# Altium PCB JUNORPCDC.PcbDoc (part 3 of 4)
Units mil, origin at the board's own origin, x right, y up, seen from the top; angles counter-clockwise.
Board outline 12224.75 x 6712.94 mil, 12 copper layers (Top Layer, Internal Plane 1, Signal Layer 1, Internal Plane 2, Internal Plane 3, Signal Layer 2, Internal Plane 4, Signal Layer 3, Internal Plane 5, Signal Layer 4, Internal Plane 6, Bottom Layer), stack 101.97 mil thick; 156 components, 400 nets, 1963 pads, 846 vias.
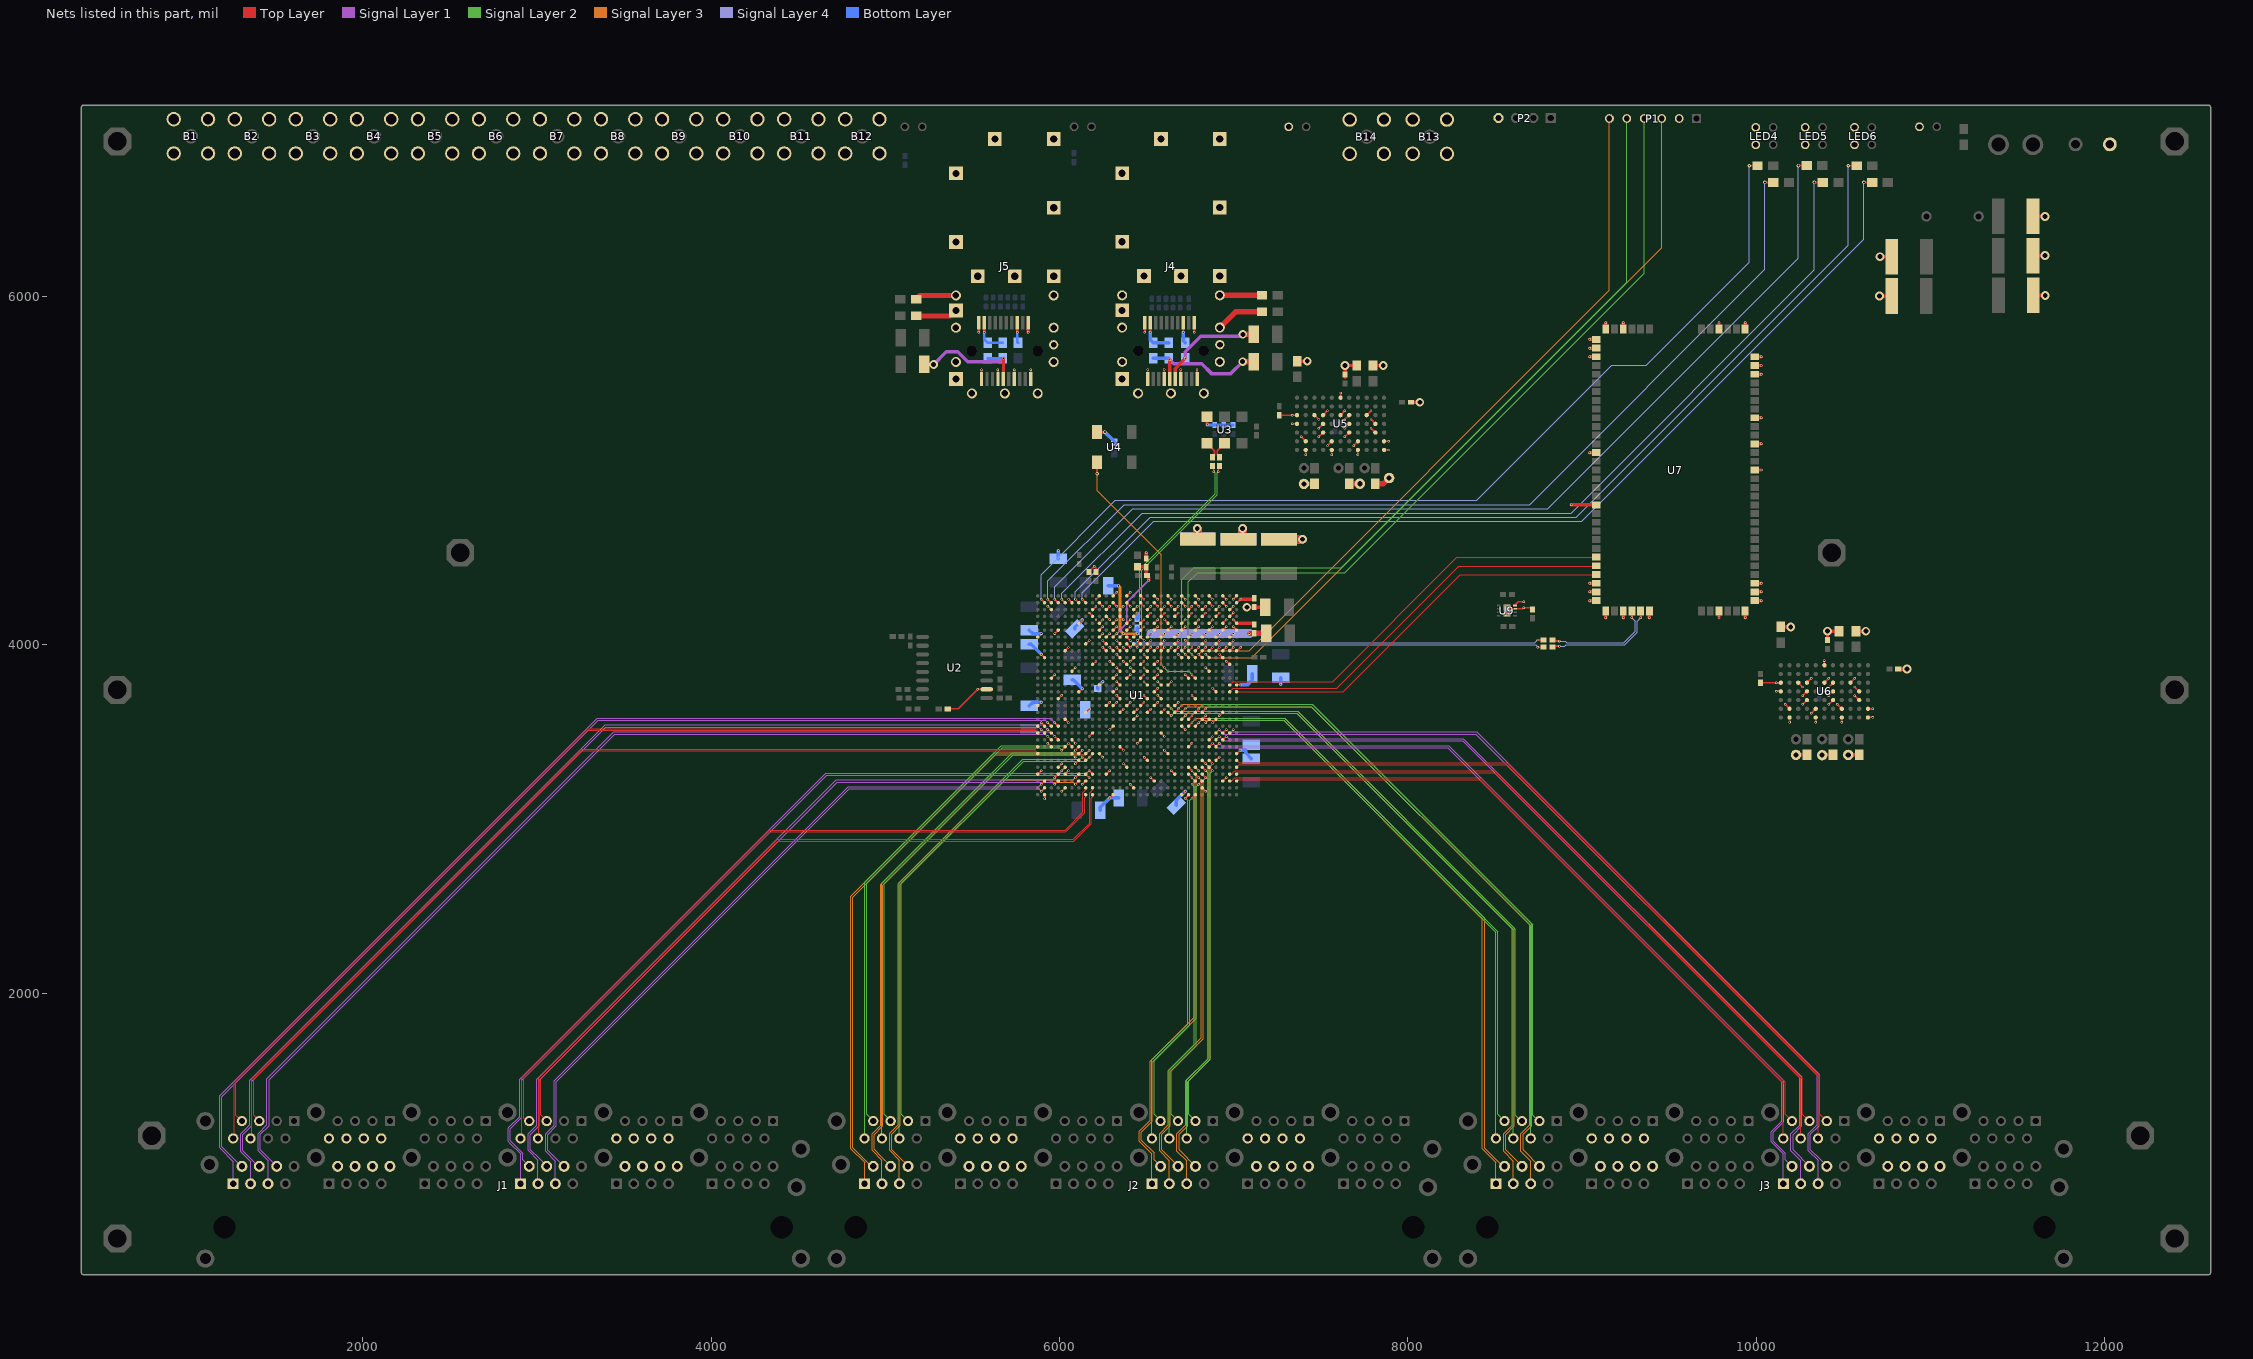
[diagram p13: the nets of this part, all layers, seen from the top]

## Via types
v1: diameter 14, hole 8, Top Layer to Bottom Layer, 811 vias
v2: diameter 50, hole 28, Top Layer to Bottom Layer, 26 vias
v3: diameter 20, hole 10, Top Layer to Bottom Layer, 9 vias

## Nets (pads, with @x,y where several pads share a name; then routed paths per layer and width w, separated by ;. In a path a pad name is that pad's centre, name@x,y a point inside that pad or via, vN(x,y) a via of type N, cw(c..) or ccw(c..) an arc to the next point about the centre after c; other vN are vias at no path point) (continued)
FTDI3_LVDS25_N: J1.G5 U1.AG22 | length 6033.1
  Top Layer w8: v1(5972,3473) U1.AG22@5991.29,3453.71
  Top Layer w10: U1.AG22@5991.29,3453.71 U1.AG22@5992.31,3453.71
  Signal Layer 1 w4: J1.G5@1455,905 1455,1038.03 1399,1094.03 1399,1193 1449,1243 1449,1506.97 3441.03,3499 5946,3499 v1(5972,3473)
FTDI3_LVDS25_P: J1.G6 U1.AH22 | length 5884.6
  Top Layer w10: v1(5933,3473) 5933.65,3473 U1.AH22@5952.94,3453.71
  Signal Layer 1 w4: J1.G6@1505,1005 1411,1099 1411,1188.03 1461,1238.03 1461,1502 3446,3487 5919,3487 v1(5933,3473)
FTDI4_LVDS25_N: J1.J5 U1.AJ28 | length 4162.5
  Top Layer w8: v1@5894.08,3198 U1.AJ28@5913.57,3217.49
  Top Layer w10: v1(5894,3198) v1@5894.08,3198
  Signal Layer 1 w4: J1.J5@3105,905 3105,1035.03 3049,1091.03 3049,1192 3099,1242 3099,1495.97 4787.03,3184 5880,3184 v1(5894,3198)
FTDI4_LVDS25_P: J1.J6 U1.AJ29 | length 4060.7
  Top Layer w8: v1@5894,3158.55 U1.AJ29@5913.57,3178.12
  Top Layer w10: v1(5894,3158) v1@5894,3158.55
  Signal Layer 1 w4: J1.J6@3155,1005 3152,1005 3061,1096 3061,1187.03 3111,1237.03 3111,1491 4792,3172 5880,3172 v1(5894,3158)
FTDI5_LVDS25_N: J2.A4 U1.AC25 | length 2845.5
  Top Layer w8: v1@6130.39,3355 U1.AC25@6149.79,3335.6
  Top Layer w10: v1(6130,3355) v1@6130.39,3355
  Signal Layer 2 w4: J2.A4@5080,1165 5080,2633.97 5788.03,3342 6117,3342 v1(6130,3355)
FTDI5_LVDS25_P: J2.A3 U1.AB24 | length 2785.9
  Top Layer w8: v1@6169.19,3355 U1.AB24@6189.16,3374.97
  Top Layer w10: v1(6169,3355) v1@6169.19,3355
  Signal Layer 2 w4: J2.A3@5130,1265 5092,1303 5092,2629 5793,3330 6144,3330 v1(6169,3355)
FTDI6_LVDS25_N: J2.D4 U1.F26 | length 2195.8
  Top Layer w8: U1.F26@6819.08,3295.92 v1(6839,3276)
  Top Layer w10: U1.F26@6819.08,3295.92 U1.F26@6819.08,3296.23
  Signal Layer 2 w4: J2.D4@6730,1165 6730,1501 6852.5,1623.5 6852.5,3262.5 v1(6839,3276)
FTDI6_LVDS25_P: J2.D3 U1.E26 | length 2111.4
  Top Layer w8: U1.E26@6858.45,3295.55 v1(6878,3276)
  Top Layer w10: U1.E26@6858.45,3295.55 U1.E26@6858.45,3296.23
  Signal Layer 2 w4: J2.D3@6780,1265 6742,1303 6742,1496.03 6864.5,1618.53 6864.5,3262.5 v1(6878,3276)
FTDI7_LVDS25_N: J2.G5 U1.AD27 | length 3064
  Top Layer w8: v1(6091,3237) U1.AD27@6110.42,3256.42
  Top Layer w10: U1.AD27@6110.42,3256.42 U1.AD27@6110.42,3256.86
  Signal Layer 3 w4: J2.G5@5080,905 5080,1040.03 5024,1096.03 5024,1195 5074,1245 5074,2627.97 5668.03,3222 5669.53,3223.5 6077.5,3223.5 v1(6091,3237)
FTDI7_LVDS25_P: J2.G6 U1.AD28 | length 2961.5
  Top Layer w8: v1@6091,3198.07 U1.AD28@6110.42,3217.49
  Top Layer w10: v1(6091,3198) v1@6091,3198.07
  Signal Layer 1 w4: J2.G6@5130,1005 J2.G6@5130,1007
  Signal Layer 3 w4: J2.G6@5130,1005 5130,1007 5075,1062 5036,1101 5036,1190.03 5086,1240.03 5086,2623 5674.5,3211.5 6077.5,3211.5 v1(6091,3198)
FTDI8_LVDS25_N: J2.J5 U1.F25 | length 2541.8
  Top Layer w8: U1.F25@6819.4,3335.6 v1(6839,3316)
  Top Layer w10: U1.F25@6819.08,3335.6 U1.F25@6819.4,3335.6
  Signal Layer 3 w4: J2.J5@6730,905 6730,1036 6674,1092 6674,1193 6724,1243 6724,1495 6852.5,1623.5 6852.5,3302.5 v1(6839,3316)
FTDI8_LVDS25_P: J2.J6 U1.E25 | length 2457.2
  Top Layer w8: U1.E25@6858.45,3335.6 v1(6878,3316)
  Signal Layer 3 w4: J2.J6@6780,1005 6686,1099 6686,1188.03 6736,1238.03 6736,1490.03 6864.5,1618.53 6864.5,3302.5 v1(6878,3316)
FTDI9_LVDS25_N: J3.A4 U1.F18 | length 3642.4
  Top Layer w8: U1.F18@6819.08,3611.19 6819.19,3611.19 v1(6839,3631)
  Signal Layer 2 w4: v1(6839,3631) 6853,3645 7446,3645 8705,2386 J3.A4@8705,1165
FTDI9_LVDS25_P: J3.A3 U1.G18 | length 3625.6
  Top Layer w8: U1.G18@6779.71,3611.19 6799,3630.48 v1(6799,3631)
  Signal Layer 2 w4: v1(6799,3631) 6825,3657 7450.97,3657 8717,2390.97 8717,1298 8750,1265 J3.A3@8755,1265
FTDI10_LVDS25_N: J3.D4 U1.A26 | length 4443.1
  Top Layer w4: U1.A26@7015.93,3296.23 7030.61,3310.91 8566.09,3310.91 10355,1522 J3.D4@10355,1165
FTDI10_LVDS25_P: J3.D3 U1.A25 | length 4376.3
  Top Layer w4: U1.A25@7015.93,3335.6 7030.61,3320.91 8570.23,3320.91 10365,1526.14 10365,1305 J3.D3@10405,1265
FTDI11_LVDS25_N: J3.G5 U1.J18 | length 4062
  Top Layer w8: U1.J18@6700.97,3611.19 6701.19,3611.19 v1(6721,3631)
  Signal Layer 3 w4: v1(6721,3631) 6735,3645 7446,3645 8699,2392 8699,1243 8649,1193 8649,1091 8705,1035 J3.G5@8705,905
FTDI11_LVDS25_P: J3.G6 U1.K18 | length 4042.2
  Top Layer w8: U1.K18@6661.6,3611.19 6681,3630.59 v1(6681,3631)
  Signal Layer 3 w4: v1(6681,3631) 6707,3657 7450.97,3657 8711,2396.97 8711,1238.03 8661,1188.03 8661,1099 J3.G6@8755,1005
FTDI12_LVDS25_N: J3.J5 U1.D21 | length 4949
  Top Layer w8: U1.D21@6897.82,3493.08 6917,3512.26 v1(6917,3513)
  Signal Layer 1 w4: v1(6917,3513) 6943,3487 8390,3487 10349,1528 10349,1243 10299,1193 10299,1095.03 10355,1039.03 J3.J5@10355,905
FTDI12_LVDS25_P: J3.J6 U1.C21 | length 4839.9
  Top Layer w8: U1.C21@6937.19,3493.08 6957,3512.89 v1(6957,3513)
  Signal Layer 1 w4: v1(6957,3513) 6971,3499 8394.97,3499 10361,1532.97 10361,1238.03 10311,1188.03 10311,1100 10361,1050 10405,1006 J3.J6@10405,1005
FTDO1_LVDS25_N: J1.A8 U1.AK20 | length 5787.4
  Top Layer w4: J1.A8@1255,1165 1261,1171 1261,1491.14 3287.62,3517.76 5859.51,3517.76 U1.AK20@5874.2,3532.45
FTDO1_LVDS25_P: J1.A7 U1.AK21 | length 5682.4
  Top Layer w4: J1.A7@1305,1265 1271,1299 1271,1487 3291.76,3507.76 5859.51,3507.76 U1.AK21@5874.2,3493.08
FTDO2_LVDS25_N: J1.D8 U1.AC29 | length 4351.3
  Top Layer w4: J1.D8@2905,1165 2912,1172 2912,1514.14 4333.86,2936 6031,2936 6133,3038 6133,3149.49 6149.79,3166.28 U1.AC29@6149.79,3178.12
FTDO2_LVDS25_P: J1.D7 U1.AC30 | length 4229.1
  Top Layer w4: J1.D7@2955,1265 2937,1265 2922,1280 2922,1510 4338,2926 6035.14,2926 6143,3033.86 6143,3120.12 6149.79,3126.91 U1.AC30@6149.79,3138.75
FTDO3_LVDS25_N: J1.G1 U1.AG20 | length 6270.7
  Top Layer w8: v1(5972,3552) 5991.55,3532.45 U1.AG20@5992.31,3532.45
  Signal Layer 1 w4: J1.G1@1255,905 1256.51,906.51 1256.51,1032.51 1177,1112.03 1177,1409.97 3345.03,3578 5946,3578 v1(5972,3552)
FTDO3_LVDS25_P: J1.G2 U1.AH20 | length 6123.3
  Top Layer w8: v1(5933,3552) 5933.39,3552 U1.AH20@5952.94,3532.45
  Signal Layer 1 w4: J1.G2@1305,1005 1301,1005 1189,1117 1189,1405 3350,3566 5919,3566 v1(5933,3552)
FTDO4_LVDS25_N: J1.J1 U1.AF26 | length 4531.1
  Top Layer w8: v1(6012,3276) U1.AF26@6031.68,3295.68
  Top Layer w10: U1.AF26@6031.68,3295.68 U1.AF26@6031.68,3296.23
  Signal Layer 1 w4: J1.J1@2905,905 2905,1076.03 2837,1144.03 2833.49,1147.54 2833.49,1224.49 2837,1228 2900,1291 2900,1504.97 4657.53,3262.5 5998.5,3262.5 v1(6012,3276)
FTDO4_LVDS25_P: J1.J2 U1.AF27 | length 4469.8
  Top Layer w8: U1.AF27@6031.86,3256.86 v1(6051,3276)
  Top Layer w10: U1.AF27@6031.68,3256.86 U1.AF27@6031.86,3256.86
  Signal Layer 1 w4: J1.J2@2955,1005 2918,1042 2918,1080 2845.49,1152.51 2845.49,1219.51 2912,1286.03 2912,1500 4662.5,3250.5 6025.5,3250.5 v1(6051,3276)
FTDO5_LVDS25_N: J2.A8 U1.AE23 | length 3000.1
  Top Layer w10: v1(6051,3434) 6051.39,3434 U1.AE23@6071.05,3414.34
  Signal Layer 2 w4: J2.A8@4880,1165 4880,2634.97 5665.03,3420 6037,3420 v1(6051,3434)
FTDO5_LVDS25_P: J2.A7 U1.AF23 | length 2857.3
  Top Layer w8: v1@6012,3394.66 U1.AF23@6031.68,3414.34
  Top Layer w10: v1(6012,3394) v1@6012,3394.66
  Signal Layer 2 w4: J2.A7@4930,1265 4892,1303 4892,2630 5670,3408 5998,3408 v1(6012,3394)
FTDO6_LVDS25_N: J2.D8 U1.H30 | length 2072.1
  Top Layer w8: v1@6721,3119.41 U1.H30@6740.34,3138.75
  Top Layer w10: v1(6721,3119) v1@6721,3119.41
  Signal Layer 2 w4: J2.D8@6530,1165 6530,1616 6734.5,1820.5 6734.5,3105.5 v1(6721,3119)
FTDO6_LVDS25_P: J2.D7 U1.G30 | length 1988
  Top Layer w8: v1(6760,3119) U1.G30@6779.71,3138.75
  Signal Layer 2 w4: J2.D7@6580,1265 6542,1303 6542,1611.03 6746.5,1815.53 6746.5,3105.5 v1(6760,3119)
FTDO7_LVDS25_N: J2.G1 U1.AD24 | length 3387.3
  Top Layer w8: U1.AD24@6110.97,3374.97 v1(6130,3394)
  Top Layer w10: U1.AD24@6110.42,3374.97 U1.AD24@6110.97,3374.97
  Signal Layer 3 w4: J2.G1@4880,905 4880,1027.03 4801,1106.03 4801,2555.97 5626.03,3381 6117,3381 v1(6130,3394)
FTDO7_LVDS25_P: J2.G2 U1.AC24 | length 3344.2
  Top Layer w8: U1.AC24@6149.97,3374.97 v1(6169,3394)
  Top Layer w10: U1.AC24@6149.79,3374.97 U1.AC24@6149.97,3374.97
  Signal Layer 1 w4: J2.G2@4919,1005 J2.G2@4930,1005
  Signal Layer 3 w4: J2.G2@4930,1005 4919,1005 4813,1111 4813,2551 5631,3369 6144,3369 v1(6169,3394)
FTDO8_LVDS25_N: J2.J1 U1.H27 | length 2526.5
  Top Layer w8: U1.H27@6740.34,3256.66 v1(6760,3237)
  Top Layer w10: U1.H27@6740.34,3256.66 U1.H27@6740.34,3256.86
  Signal Layer 3 w4: J2.J1@6530,905 6530,1077.03 6458,1149.03 6458,1207 6521,1270 6521,1607 6774,1860 6774,3223 v1(6760,3237)
FTDO8_LVDS25_P: J2.J2 U1.H26 | length 2486.6
  Top Layer w8: U1.H26@6740.34,3296.23 v1@6760,3276.57
  Top Layer w10: v1(6760,3276) v1@6760,3276.57
  Signal Layer 3 w4: J2.J2@6580,1005 6542,1043 6542,1082 6470,1154 6470,1202.03 6533,1265.03 6533,1602.03 6786,1855.03 6786,3250 v1(6760,3276)
FTDO9_LVDS25_N: J3.A8 U1.D19 | length 3348.3
  Top Layer w8: v1(6878,3552) U1.D19@6897.82,3571.82
  Signal Layer 2 w4: v1(6878,3552) 6892,3566 7287,3566 8505,2348 J3.A8@8505,1165
FTDO9_LVDS25_P: J3.A7 U1.E19 | length 3327.8
  Top Layer w8: v1(6839,3552) 6858.45,3571.45 U1.E19@6858.45,3571.82
  Signal Layer 2 w4: v1(6839,3552) 6865,3578 7291.97,3578 8517,2352.97 8517,1303 J3.A7@8555,1265
FTDO10_LVDS25_N: J3.D8 U1.A28 | length 4181.7
  Top Layer w4: U1.A28@7015.93,3217.49 7023.44,3225 8413,3225 10155,1483 J3.D8@10155,1165
FTDO10_LVDS25_P: J3.D7 U1.B28 | length 4158.4
  Top Layer w4: U1.B28@6976.56,3217.49 6988.4,3217.49 7005.91,3235 8417.14,3235 10165,1487.14 10165,1305 J3.D7@10205,1265
FTDO11_LVDS25_N: J3.G1 U1.G20 | length 3686.9
  Top Layer w8: U1.G20@6779.71,3532.45 6799,3551.74 v1(6799,3552)
  Signal Layer 3 w4: v1(6799,3552) 6813,3566 7287,3566 8428,2425 8428,1105 8505,1028 J3.G1@8505,905
FTDO11_LVDS25_P: J3.G2 U1.H20 | length 3672.5
  Top Layer w8: U1.H20@6740.34,3532.45 6740.45,3532.45 v1(6760,3552)
  Signal Layer 3 w4: v1(6760,3552) 6786,3578 7291.97,3578 8440,2429.97 8440,1110 8545,1005 J3.G2@8555,1005
FTDO12_LVDS25_N: J3.J1 U1.E23 | length 4740.7
  Top Layer w8: U1.E23@6858.45,3414.34 v1@6878,3433.89
  Top Layer w10: v1@6878,3433.89 v1(6878,3434)
  Signal Layer 1 w4: v1(6878,3434) 6904,3408 8230,3408 10146,1492 10146,1265 10085.9,1204.9 10085.9,1145.13 10155,1076.03 J3.J1@10155,905
FTDO12_LVDS25_P: J3.J2 U1.D23 | length 4632.2
  Top Layer w8: U1.D23@6897.82,3414.34 v1@6917,3433.52
  Top Layer w10: v1@6917,3433.52 v1(6917,3434)
  Signal Layer 1 w4: v1(6917,3434) 6931,3420 8234.97,3420 10158,1496.97 10158,1260.03 10097.9,1199.93 10097.9,1150.1 10167,1081 10167,1043 J3.J2@10205,1005
FTMS1_LVDS25_N: J1.A6 U1.AK23 | length 5647.8
  Top Layer w4: J1.A6@1355,1165 1362,1172 1362,1508.14 3253.51,3399.65 5859.51,3399.65 U1.AK23@5874.2,3414.34
FTMS1_LVDS25_P: J1.A5 U1.AK24 | length 5542
  Top Layer w4: J1.A5@1405,1265 1372,1298 1372,1504 3257.65,3389.65 5859.51,3389.65 U1.AK24@5874.2,3374.97
FTMS2_LVDS25_N: J1.D6 U1.AB29 | length 4327.4
  Top Layer w4: J1.D6@3005,1165 3010,1170 3010,1513.14 4378.86,2882 6078,2882 6172,2976 6172,3149.12 6189.16,3166.28 U1.AB29@6189.16,3178.12
FTMS2_LVDS25_P: J1.D5 U1.AB30 | length 4196.3
  Top Layer w4: J1.D5@3055,1265 3020,1300 3020,1509 4383,2872 6082.14,2872 6182,2971.86 6182,3119.75 6189.16,3126.91 U1.AB30@6189.16,3138.75
FTMS3_LVDS25_N: J1.G3 U1.AH21 | length 6105.7
  Top Layer w8: v1@5934.02,3512 U1.AH21@5952.94,3493.08
  Top Layer w10: v1(5933,3512) v1@5934.02,3512
  Signal Layer 1 w4: J1.G3@1355,905 1355.51,905.51 1355.51,1031.51 1302.51,1084.51 1299,1088.03 1299,1192 1302.51,1195.51 1350,1243 1350,1498.97 3390.03,3539 5906,3539 v1(5933,3512)
FTMS3_LVDS25_P: J1.G4 U1.AJ21 | length 5960.3
  Top Layer w8: v1@5894.65,3512 U1.AJ21@5913.57,3493.08
  Top Layer w10: v1(5894,3512) v1@5894.65,3512
  Signal Layer 1 w4: J1.G4@1405,1005 1399,1005 1311,1093 1311,1187.03 1362,1238.03 1362,1494 3395,3527 5879,3527 v1(5894,3512)
FTMS4_LVDS25_N: J1.J3 U1.AG27 | length 4362.8
  Top Layer w8: v1@5972.45,3237 U1.AG27@5992.31,3256.86
  Top Layer w10: v1(5972,3237) v1@5972.45,3237
  Signal Layer 1 w4: J1.J3@3005,905 3005,1040.03 2949,1096.03 2949,1192 2999,1242 2999,1504.97 4717.53,3223.5 5958.5,3223.5 v1(5972,3237)
FTMS4_LVDS25_P: J1.J4 U1.AG28 | length 4258.5
  Top Layer w8: v1@5972.82,3198 U1.AG28@5992.31,3217.49
  Top Layer w10: v1(5972,3198) v1@5972.82,3198
  Signal Layer 1 w4: J1.J4@3055,1005 3055,1007 3011,1051 2961,1101 2961,1187.03 3011,1237.03 3011,1500 4722.5,3211.5 5958.5,3211.5 v1(5972,3198)
FTMS5_LVDS25_N: J2.A6 U1.AD23 | length 2921.4
  Top Layer w8: v1(6091,3394) U1.AD23@6110.42,3413.42
  Top Layer w10: U1.AD23@6110.42,3413.42 U1.AD23@6110.42,3414.34
  Signal Layer 2 w4: J2.A6@4980,1165 4980,2630.97 5729.53,3380.5 6077.5,3380.5 v1(6091,3394)
FTMS5_LVDS25_P: J2.A5 U1.AE24 | length 2817.1
  Top Layer w8: U1.AE24@6071.05,3374.97 v1(6091,3355)
  Signal Layer 2 w4: J2.A5@5030,1265 4992,1303 4992,2626 5734.5,3368.5 6077.5,3368.5 v1(6091,3355)
FTMS6_LVDS25_N: J2.D6 U1.G28 | length 2125.8
  Top Layer w8: v1@6760.22,3198 U1.G28@6779.71,3217.49
  Top Layer w10: v1(6760,3198) v1@6760.22,3198
  Signal Layer 2 w4: J2.D6@6630,1165 6630,1560 6773.5,1703.5 6773.5,3184.5 v1(6760,3198)
FTMS6_LVDS25_P: J2.D5 U1.F28 | length 2041.9
  Top Layer w8: v1(6799,3198) U1.F28@6818.49,3217.49
  Top Layer w10: U1.F28@6818.49,3217.49 U1.F28@6819.08,3217.49
  Signal Layer 2 w4: J2.D5@6680,1265 6642,1303 6642,1555.03 6785.5,1698.53 6785.5,3184.5 v1(6799,3198)
FTMS7_LVDS25_N: J2.G3 U1.AB27 | length 3257.2
  Top Layer w8: v1@6170.15,3275.87 U1.AB27@6189.16,3256.86
  Top Layer w10: v1(6169,3275.87) v1@6170.15,3275.87 ; U1.AB27@6189.16,3256.86 U1.AB27@6189.86,3256.86
  Signal Layer 3 w4: J2.G3@4980,905 4980,1041.03 4924,1097.03 4924,1192 4974,1242 4974,2624.97 5611.53,3262.5 6155.63,3262.5 v1(6169,3275.87)
FTMS7_LVDS25_P: J2.G4 U1.AC27 | length 3155.5
  Top Layer w8: U1.AC27@6149.79,3256.08 v1(6169,3236.87)
  Top Layer w10: U1.AC27@6149.79,3256.08 U1.AC27@6149.79,3256.86 U1.AC27@6149.86,3256.86
  Signal Layer 1 w4: J2.G4@5030,1005 J2.G4@5030,1008
  Signal Layer 3 w4: J2.G4@5030,1005 5030,1008 4977,1061 4936,1102 4936,1187.03 4986,1237.03 4986,2620 5616.5,3250.5 6155.37,3250.5 v1(6169,3236.87)
FTMS8_LVDS25_N: J2.J3 U1.G27 | length 2487.8
  Top Layer w8: U1.G27@6779.71,3256.86 v1@6799,3237.57
  Top Layer w10: v1(6799,3237) v1@6799,3237.57
  Signal Layer 3 w4: J2.J3@6630,905 6630,1037 6574,1093 6574,1193 6624,1243 6624,1554 6813,1743 6813,3223 v1(6799,3237)
FTMS8_LVDS25_P: J2.J4 U1.F27 | length 2403.9
  Top Layer w8: U1.F27@6819.08,3256.86 v1(6839,3237)
  Top Layer w10: U1.F27@6819.08,3256.86 U1.F27@6819.08,3256.86
  Signal Layer 3 w4: J2.J4@6680,1005 6586,1099 6586,1188.03 6636,1238.03 6636,1549.03 6825,1738.03 6825,3223 v1(6839,3237)
FTMS9_LVDS25_N: J3.A6 U1.L18 | length 3709
  Top Layer w8: U1.L18@6622.23,3611.19 6642,3591.42 v1(6642,3591)
  Signal Layer 2 w4: v1(6642,3591) 6656,3605 7362,3605 8605,2362 J3.A6@8605,1165
FTMS9_LVDS25_P: J3.A5 U1.L17 | length 3646.5
  Top Layer w8: U1.L17@6622.23,3650.56 6622.44,3650.56 v1(6642,3631)
  Signal Layer 2 w4: v1(6642,3631) 6656,3617 7366.97,3617 8617,2366.97 8617,1299 8651,1265 J3.A5@8655,1265
FTMS10_LVDS25_N: J3.D6 U1.A27 | length 4312.6
  Top Layer w4: U1.A27@7015.93,3256.86 7024.07,3265 8497,3265 10255,1507 J3.D6@10255,1165
FTMS10_LVDS25_P: J3.D5 U1.B27 | length 4289.3
  Top Layer w4: U1.B27@6976.56,3256.86 6988.4,3256.86 7006.54,3275 8501.14,3275 10265,1511.14 10265,1305 J3.D5@10305,1265
FTMS11_LVDS25_N: J3.G3 U1.H19 | length 3891.7
  Top Layer w8: U1.H19@6740.34,3571.82 6740.82,3571.82 v1(6760,3591)
  Signal Layer 3 w4: v1(6760,3591) 6774,3605 7362,3605 8599,2368 8599,1242 8549,1192 8549,1090.43 8605,1034.43 J3.G3@8605,905
FTMS11_LVDS25_P: J3.G4 U1.J19 | length 3871.7
  Top Layer w8: U1.J19@6700.97,3571.82 6701.82,3571.82 v1(6721,3591)
  Signal Layer 3 w4: v1(6721,3591) 6747,3617 7366.97,3617 8611,2372.97 8611,1237.03 8561,1187.03 8561,1099 J3.G4@8655,1005
FTMS12_LVDS25_N: J3.J3 U1.D22 | length 4823
  Top Layer w10: U1.D22@6897.82,3453.71 6897.82,3453.82 v1(6917,3473)
  Signal Layer 1 w4: v1(6917,3473) 6942,3448 8314,3448 10249,1513 10249,1242 10199,1192 10199,1094.03 10255,1038.03 J3.J3@10255,905
FTMS12_LVDS25_P: J3.J4 U1.C22 | length 4714.2
  Top Layer w8: U1.C22@6937.71,3453.71 v1(6957,3473)
  Top Layer w10: U1.C22@6937.19,3453.71 U1.C22@6937.71,3453.71
  Signal Layer 1 w4: v1(6957,3473) 6970,3460 8318.97,3460 10261,1517.97 10261,1237.03 10211,1187.03 10211,1099 J3.J4@10305,1005
GND: B1.2 B1.3 B1.4 B1.5 B2.2 B2.3 B2.4 B2.5 B3.2 B3.3 B3.4 B3.5 B4.2 B4.3 B4.4 B4.5 B5.2 B5.3 B5.4 B5.5 B6.2 B6.3 B6.4 B6.5 B7.2 B7.3 B7.4 B7.5 B8.2 B8.3 B8.4 B8.5 B9.2 B9.3 B9.4 B9.5 B10.2 B10.3 B10.4 B10.5 B11.2 B11.3 B11.4 B11.5 B12.2 B12.3 B12.4 B12.5 B13.2 B13.3 B13.4 B13.5 B14.2 B14.3 B14.4 B14.5 C1.1 C2.1 C3.1 C4.1 C6.1 C8.1 C9.1 C10.1 C11.1 C12.1 C13.1 C14.1 C15.1 C16.1 C17.1 C18.1 C19.1 C20.1 C21.1 C22.1 C23.1 C24.1 C25.1 C26.1 C27.1 C28.1 C29.1 C30.1 C31.1 C32.1 C33.1 C34.1 C35.1 C36.1 C37.1 C38.1 C39.1 C40.1 C41.1 C44.1 C45.1 C46.1 C47.1 C48.1 C49.1 C50.1 C51.1 C52.1 C55.1 C56.1 C57.1 C58.1 C59.1 C60.1 C61.1 C62.1 C70.2 FB1.1 J1.B2 J1.B4 J1.B6 J1.B8 J1.E2 J1.E4 J1.E6 J1.E8 J1.H2 J1.H4 J1.H6 J1.H8 J1.K2 J1.K4 J1.K6 J1.K8 J2.B2 J2.B4 J2.B6 J2.B8 J2.E2 J2.E4 J2.E6 J2.E8 J2.H2 J2.H4 J2.H6 J2.H8 J2.K2 J2.K4 J2.K6 J2.K8 J3.B2 J3.B4 J3.B6 J3.B8 J3.E2 J3.E4 J3.E6 J3.E8 J3.H2 J3.H4 J3.H6 J3.H8 J3.K2 J3.K4 J3.K6 J3.K8 J4.1 J4.3 J4.9 J4.10 J4.11 J4.14 J4.17 J4.20 J4.S1 J4.S2 J4.S3 J4.S4 J4.S5 J4.S6 J4.S7 J4.S8 J4.S9 J4.S10 J4.S11 J4.S12 J4.S13 J4.S14 J4.S15 J4.S16 J4.S17 J4.S18 J4.S19 J4.S20 J5.1 J5.3 J5.9 J5.10 J5.11 J5.14 J5.17 J5.20 J5.S1 J5.S2 J5.S3 J5.S4 J5.S5 J5.S6 J5.S7 J5.S8 J5.S9 J5.S10 J5.S11 J5.S12 J5.S13 J5.S14 J5.S15 J5.S16 J5.S17 J5.S18 J5.S19 J5.S20 LED1.2 LED4.2 LED4.4 LED5.2 LED5.4 LED6.2 LED6.4 LED7.2 P1.2 P2.4 P3.2 pad.5 pad.7 pad.9 pad.11 pad.13 pad.15 R4.2 R5.2 R44.1 R45.1 R47.1 R48.1 R49.1 R50.1 U1.A1 U1.A2 U1.A5 U1.A6 U1.A9 U1.A14 U1.A24 U1.AA1 U1.AA2 U1.AA5 U1.AA6 U1.AA7 U1.AA14 U1.AA24 U1.AB3 U1.AB4 U1.AB11 U1.AB21 U1.AC8 U1.AC18 U1.AC28 U1.AD5 U1.AD15 U1.AD25 U1.AE2 U1.AE12 U1.AE22 U1.AF9 U1.AF19 U1.AF29 U1.AG6 U1.AG16 U1.AG26 U1.AH3 U1.AH13 U1.AH23 U1.AJ10 U1.AJ20 U1.AJ30 U1.AK7 U1.AK17 U1.AK27 U1.B4 U1.B8 U1.B9 U1.B11 U1.B21 U1.C1 U1.C2 U1.C6 U1.C9 U1.C10 U1.C18 U1.C28 U1.D4 U1.D8 U1.D9 U1.D15 U1.D25 U1.E1 U1.E2 U1.E6 U1.E9 U1.E12 U1.E22 U1.F4 U1.F8 U1.F9 U1.F19 U1.F29 U1.G1 U1.G2 U1.G6 U1.G9 U1.G16 U1.G26 U1.H4 U1.H8 U1.H9 U1.H13 U1.H23 U1.J1 U1.J2 U1.J6 U1.J9 U1.J10 U1.J20 U1.J30 U1.K4 U1.K8 U1.K9 U1.K17 U1.K27 U1.L1 U1.L2 U1.L6 U1.L9 U1.L14 U1.L24 U1.M4 U1.M8 U1.M9 U1.M12 U1.M14 U1.M16 U1.M18 U1.M21 U1.N1 U1.N2 U1.N6 U1.N9 U1.N11 U1.N13 U1.N15 U1.N17 U1.N28 U1.P4 U1.P8 U1.P9 U1.P10 U1.P12 U1.P14 U1.P16 U1.P18 U1.P25 U1.R1 U1.R2 U1.R6 U1.R9 U1.R11 U1.R13 U1.R17 U1.R22 U1.T4 U1.T8 U1.T10 U1.T12 U1.T16 U1.T18 U1.T19 U1.T29 U1.U1 U1.U2 U1.U6 U1.U9 U1.U11 U1.U13 U1.U17 U1.U26 U1.V4 U1.V8 U1.V9 U1.V10 U1.V12 U1.V14 U1.V16 U1.V18 U1.V23 U1.W1 U1.W2 U1.W6 U1.W9 U1.W11 U1.W13 U1.W15 U1.W17 U1.W20 U1.W30 U1.Y3 U1.Y4 U1.Y7 U1.Y8 U1.Y9 U1.Y17 U1.Y27 U2.10 U3.3 U4.2 U5.A4 U5.A5 U5.B1 U5.B2 U5.C5 U5.D3 U5.D4 U5.D5 U5.E1 U5.E2 U5.F5 U5.F7 U5.G3 U5.G4 U5.G5 U5.H1 U5.H2 U5.J5 U5.K3 U5.K4 U5.L1 U5.L2 U6.A4 U6.A5 U6.B1 U6.B2 U6.C5 U6.D3 U6.D4 U6.D5 U6.E1 U6.E2 U6.F5 U6.F7 U6.G3 U6.G4 U6.G5 U6.H1 U6.H2 U6.J5 U6.K3 U6.K4 U6.L1 U6.L2 U7.A2 U7.A4 U7.A7 U7.A10 U7.A13 U7.B1 U7.B2 U7.B3 U7.B16 U7.B19 U7.B22 U7.B27 U7.B28 U7.B29 U7.C2 U7.C5 U7.C11 U7.C13 U7.D1 U7.D2 U7.D3 U7.D12 U7.D18 U7.D29 U7.D30 U7.D31 U9.0 U9.7 U9.8 | length 13853.9
  Top Layer w8: C1.1@5357.59,3631.18 5417.18,3631.18 v1(5530,3744) U2.10@5581.24,3744 ; U1.AK17@5874.2,3650.56 5893.64,3670 v1(5894.08,3670) ; U1.AK7@5874.2,4044.26 5893.6,4063.66 v1(5893.6,4064) ; U1.AK27@5874.94,3256.86 v1(5894.08,3276) ; v1(5893.6,3552) 5894.02,3552 U1.AJ20@5913.57,3532.45 ; v1(5893.6,3945.97) 5893.75,3945.97 U1.AJ10@5913.57,3926.15 U1.AJ10@5913.69,3926.15 ; v1(5913.57,3116) U1.AJ30@5913.57,3138.75 ; v1(5933,4220.92) 5933.76,4220.92 U1.AH3@5952.94,4201.74 U1.AH3@5953.19,4201.74 ; v1@5933.28,3434 U1.AH23@5952.94,3414.34 ; U1.AH13@5952.94,3808.04 5972.82,3827.92 v1(5972.82,3828) ; v1(5972.42,4063.97) 5972.65,4063.97 U1.AG6@5992.31,4083.63 U1.AG6@5993.02,4083.63 ; U1.AG26@5992.31,3296.23 v1@6011.69,3315.61 ; U1.AG16@5992.31,3689.93 6012.28,3709.9 v1(6012.28,3710) ; v1(6012,3158) U1.AF29@6031.68,3177.68 ; U1.AF19@6031.68,3571.82 6051.06,3552.44 v1(6051.06,3552) ; U1.AF9@6031.68,3965.52 6032.57,3965.52 v1(6051.06,3984) ; v1(6051,4261) 6051.16,4261 U1.AE2@6071.05,4241.11 ; U1.AE22@6071.05,3453.71 v1@6090.76,3434 ; U1.AE12@6071.05,3847.41 6071.17,3847.41 v1(6090.76,3867) ; v1(6091,3315.93) U1.AD25@6110.42,3335.35 ; U1.AD15@6110.42,3729.3 6111.69,3729.3 v1(6130.39,3748) ; U1.AD5@6110.42,4123 6111.39,4123 v1(6130.39,4142) ; v1@6130.23,3197.93 U1.AC28@6149.79,3217.49 ; U1.AC18@6149.79,3611.19 6151.19,3611.19 v1(6169,3629) ; U1.AC8@6149.79,4004.89 6151.04,4004.89 v1(6170.15,4024) ; v1(6169,3473) 6169.08,3473 U1.AB21@6189.16,3493.08 ; v1(6169,4182) 6169.53,4182 U1.AB4@6189.16,4162.37 ; R5.2@6169,4417.59 6169,4421 v1(6198,4450) 6209,4439 R4.2@6209,4417.59 ; U1.AB11@6189.16,3886.78 6189.78,3886.78 v1(6209,3906) ; U1.AB3@6189.16,4201.74 6189.74,4201.74 v1(6209,4221) ; v1@6209,4260.64 v1(6209,4261) ; v1(6209,4261) U1.AA1@6228.53,4280.48 ; U1.AA24@6228.53,3374.97 v1@6248,3355.5 ; U1.AA14@6228.53,3768.67 6229.06,3768.67 v1(6248.39,3788) ; U1.AA7@6228.53,4044.26 6229.65,4044.26 v1(6248.39,4063) ; U1.AA6@6228.53,4083.63 6229.02,4083.63 v1(6248.39,4103) ; U1.AA5@6228.53,4123 6229.39,4123 v1(6248.39,4142) ; U1.AA2@6228.53,4241.11 6248.39,4221.25 v1(6248.39,4220.95) ; v1(6248.39,3985) U1.Y9@6267.9,3965.52 ; v1(6248.39,4024) 6248.79,4024 U1.Y8@6267.9,4004.89 ; U1.Y27@6267.9,3256.86 v1(6287,3276) ; U1.Y17@6267.9,3650.56 6268.34,3650.56 v1(6287.78,3670) ; U1.Y7@6267.9,4044.26 6269.04,4044.26 v1(6287.78,4063) ; U1.Y4@6267.9,4162.37 6268.23,4162.37 v1(6287.6,4143) ; U1.Y3@6267.9,4201.74 v1(6287.15,4221) ; v1(6287.41,3906) 6288.05,3906 U1.W11@6307.27,3886.78 ; v1(6287.6,3513) 6307.05,3532.45 U1.W20@6307.27,3532.45 ; v1(6287.6,3985) 6287.79,3985 U1.W9@6307.27,3965.52 ; v1@6288.52,3120 U1.W30@6307.27,3138.75 ; U1.W17@6307.27,3650.56 6307.56,3650.56 v1(6327,3670) ; U1.W15@6307.27,3729.3 6308.3,3729.3 v1(6327,3748) ; U1.W13@6307.27,3808.04 6307.27,3808.27 v1(6327,3828) ; U1.W6@6307.27,4083.63 6307.63,4083.63 v1(6327,4103) ; U1.W1@6307.27,4280.48 6307.53,4280.48 v1(6327.05,4300) ; U1.W2@6308.11,4241.11 U1.W2@6307.27,4241.11 6327,4221.38 v1(6327,4221) ; v1(6327,3709) 6327.57,3709 U1.V16@6346.64,3689.93 ; v1(6327,3946) 6346.64,3926.36 U1.V10@6346.64,3926.15 ; v1(6327,3985) 6327.16,3985 U1.V9@6346.64,3965.52 ; v1(6327,4024) 6327.53,4024 U1.V8@6346.64,4004.89 ; v1(6327.05,3788) 6346.38,3768.67 U1.V14@6346.64,3768.67 ; v1(6327,3867) U1.V12@6346.64,3847.41 ; U1.V23@6346.66,3414.34 v1(6367,3394) ; U1.V18@6346.64,3611.19 6365.93,3630.48 v1(6366,3630.48) ; U1.V4@6346.64,4162.37 v1(6366,4143) ; v1(6366,3906) 6366.79,3906 U1.U11@6386.01,3886.78 U1.U11@6386.78,3886.78 ; v1(6366,3985) 6366.53,3985 U1.U9@6386.01,3965.52 ; v1@6367,3315.24 U1.U26@6386.01,3296.23 ; U1.U17@6386.01,3650.56 6386.56,3650.56 v1(6406,3670) ; U1.U6@6386.01,4083.63 6386.63,4083.63 v1(6406,4103) ; U1.U1@6386.01,4280.48 6386.48,4280.48 v1(6406,4300) ; U1.U13@6386.01,3808.04 v1(6406,3828) ; U1.U2@6387.11,4241.11 U1.U2@6386.01,4241.11 6406,4221.12 v1(6406,4221) ; v1@6406,3197.5 U1.T29@6425.38,3178.12 ; v1(6406,3709) 6406.31,3709 U1.T16@6425.38,3689.93 ; v1(6406,3867) 6406,3866.79 U1.T12@6425.38,3847.41 ; v1(6406,3906) 6425.38,3925.38 U1.T10@6425.38,3926.15 ; U1.T19@6425.38,3571.82 6426.06,3571.82 v1(6445.24,3591) ; U1.T18@6425.38,3611.19 6425.94,3611.19 v1(6445.24,3630.48) ; U1.T8@6425.38,4004.89 6425.72,4004.89 v1(6445.61,3985) ; U1.T4@6425.38,4162.37 v1(6445,4182) ; v1(6445,3434) U1.R22@6464.75,3453.71 ; U1.R17@6464.75,3650.56 6465.13,3650.56 v1(6484.57,3670) ; U1.R13@6464.75,3808.04 6484.57,3827.86 v1(6484.57,3828) ; U1.R11@6464.75,3886.78 6465.35,3886.78 v1(6484.57,3906) ; U1.R9@6464.75,3965.52 6465.09,3965.52 v1(6484.57,3985) ; U1.R6@6464.75,4083.63 6465.2,4083.63 v1(6484.57,4103) ; U1.R1@6464.75,4280.48 6484.57,4260.66 v1(6484.57,4260) ; U1.R2@6465.68,4241.11 U1.R2@6464.75,4241.11 6484.57,4221.29 v1(6484.57,4221) ; v1(6484.45,3788) 6503.78,3768.67 U1.P14@6504.12,3768.67 U1.P14@6504.76,3768.67 ; v1(6484.57,3709) 6503.64,3689.93 U1.P16@6504.12,3689.93 ; v1(6484.57,3867) U1.P12@6504.12,3847.41 ; v1(6484.57,3945) 6503.42,3926.15 U1.P10@6504.12,3926.15 ; v1@6485.11,3354.61 U1.P25@6504.12,3335.6 ; U1.P18@6504.12,3611.19 6504.46,3611.19 v1(6523.87,3630.59) ; U1.P9@6504.12,3965.52 6504.87,3965.52 v1(6524.35,3985) ; U1.P8@6504.12,4004.89 6505.24,4004.89 v1(6524.35,4024) ; U1.P4@6504.12,4162.37 6504.24,4162.37 v1(6523.87,4182) ; v1(6524,3237) U1.N28@6543.49,3217.49 ; U1.N17@6543.49,3650.56 6543.56,3650.56 v1(6563,3670) ; U1.N15@6543.49,3729.3 6563,3748.81 v1(6563,3749) ; U1.N13@6543.49,3808.04 6563,3827.55 v1(6563,3828) ; U1.N11@6543.49,3886.78 6543.78,3886.78 v1(6563,3906) ; U1.N9@6543.49,3965.52 v1(6563,3985) ; U1.N6@6543.49,4083.63 6543.63,4083.63 v1(6563,4103) ; U1.N1@6543.49,4280.48 6543.49,4279.97 v1(6563.46,4260) ; U1.N2@6544.57,4241.11 U1.N2@6543.49,4241.11 6563.46,4221.14 v1(6563.46,4221) ; v1(6563,3709) 6563.79,3709 U1.M16@6582.86,3689.93 ; v1(6563,3866) 6564.27,3866 U1.M12@6582.86,3847.41 ; v1(6563.46,3788) v1(6563.46,3788) U1.M14@6582.86,3768.67 ; U1.M21@6582.86,3493.08 6582.86,3492.05 v1(6602,3472.91) ; U1.M18@6582.86,3611.19 6583.17,3611.19 v1(6602.46,3630.48) ; U1.M9@6582.86,3965.52 6602,3984.66 v1(6602,3985) ; U1.M4@6582.86,4162.37 v1(6602.46,4182) ; U1.M8@6582.86,4004.89 v1(6602,4024) ; v1(6602,3394) U1.L24@6621.03,3374.97 ; U1.L14@6622.23,3768.67 6623.13,3768.67 v1(6642.46,3788) ; U1.L9@6622.23,3965.52 6622.52,3965.52 v1(6642,3985) ; U1.L6@6622.23,4083.63 6622.63,4083.63 v1(6642,4103) ; U1.L1@6622.23,4280.48 6622.23,4279.77 v1(6642,4260) ; U1.L2@6623.11,4241.11 U1.L2@6622.23,4241.11 6642,4221.34 v1(6642,4221) ; v1@6642.46,3276 U1.K27@6661.6,3256.86 ; U1.K17@6661.6,3650.56 6661.76,3650.56 v1(6681.2,3670) ; U1.K9@6661.6,3965.52 6661.72,3965.52 v1(6681.2,3985) ; U1.K8@6661.6,4004.89 6680.71,4024 v1(6681.2,4024) ; U1.K4@6661.6,4162.37 6681,4181.77 v1(6681,4182) ; v1(6681,3946) 6700.85,3926.15 U1.J10@6700.97,3926.15 ; U1.J20@6700.97,3532.45 v1(6721,3512.37) ; U1.J9@6700.97,3965.52 6720.45,3985 v1(6721,3985) ; U1.J6@6700.97,4083.63 6701.63,4083.63 v1(6721,4103) ; U1.J1@6700.97,4280.48 6721,4260.45 v1(6721,4260) ; U1.J2@6702.11,4241.11 U1.J2@6700.97,4241.11 6721,4221.08 v1(6721,4221) ; v1(6721,3828) 6740.34,3808.66 U1.H13@6740.34,3808.04 ; v1(6721,4025) 6721,4024.23 U1.H8@6740.34,4004.89 U1.H8@6741.11,4004.89 ; U1.H23@6740.34,3414.34 v1@6759.94,3433.94 ; U1.H9@6740.34,3965.52 6740.74,3965.52 v1(6760.22,3985) ; U1.H4@6740.34,4162.37 6759.63,4181.66 v1(6759.63,4182) ; v1(6760,3710) 6779.71,3690.29 U1.G16@6779.71,3689.93 ; U1.G26@6779.71,3296.23 v1@6799,3276.94 ; U1.G9@6779.71,3965.52 6799,3984.81 v1(6799,3985) ; U1.G6@6779.71,4083.63 6799,4102.92 v1(6799,4103) ; U1.G1@6779.71,4280.48 6799,4261.19 v1(6799,4260) ; U1.G2@6780.11,4241.11 U1.G2@6779.71,4241.11 6779.71,4240.29 v1(6799,4221) ; U1.F29@6819.08,3177.68 v1(6839,3157.76) ; U1.F19@6819.08,3571.82 6819.61,3571.82 v1(6838.79,3591) ; U1.F9@6819.08,3965.52 6819.52,3965.52 v1(6839,3985) ; U1.F8@6819.08,4004.89 6819.89,4004.89 v1(6839,4024) ; U1.F4@6819.08,4162.37 6819.16,4162.37 v1(6838.79,4182) ; v1(6839,3867) 6858.45,3847.55 U1.E12@6858.45,3847.41 ; U1.E9@6858.45,3965.52 6858.52,3965.52 v1(6878,3985) ; U1.E6@6858.45,4083.63 6858.63,4083.63 v1(6878,4103) ; U1.E1@6858.45,4280.48 6858.45,4279.55 v1(6878,4260) ; U1.E22@6858.71,3453.71 v1(6878,3473) ; U1.E2@6859.11,4241.11 U1.E2@6858.45,4241.11 6858.45,4240.55 v1(6878,4221) ; v1(6878,3749) 6878.12,3749 U1.D15@6897.82,3729.3 ; U1.D25@6897.82,3335.6 v1@6917,3354.78 ; U1.D9@6897.82,3965.52 6898.52,3965.52 v1(6918,3985) ; U1.D8@6897.82,4004.89 6898.89,4004.89 v1(6918,4024) ; U1.D4@6897.82,4162.37 6917,4181.55 v1(6917,4182) ; v1(6917,3591) U1.C18@6937.19,3611.19 ; v1(6918,3946) 6918,3945.34 U1.C10@6937.19,3926.15 ; U1.C9@6937.19,3965.52 6937.52,3965.52 v1(6957,3985) ; U1.C6@6937.19,4083.63 6956.56,4103 v1(6956.74,4103) ; U1.C1@6937.19,4280.48 6937.19,4279.55 v1(6956.74,4260) ; U1.C28@6937.49,3217.49 v1(6957,3237) ; U1.C2@6937.85,4241.11 U1.C2@6937.19,4241.11 6956.74,4221.56 v1(6956.74,4221) ; v1(6957,3906) 6957.34,3906 U1.B11@6976.56,3886.78 ; U1.B21@6976.56,3493.08 6976.56,3493.3 v1(6996.15,3512.89) ; U1.B9@6976.56,3965.52 6977.04,3965.52 v1(6996.52,3985) ; U1.B8@6976.56,4004.89 6977.41,4004.89 v1(6996.52,4024) ; U1.B4@6976.56,4162.37 6996,4181.81 v1(6996,4183) ; v1(6995.89,4103) 6996.56,4103 U1.A6@7015.93,4083.63 ; v1(6996,4142) 6996.93,4142 U1.A5@7015.93,4123 ; v1(6996,4260) 7015.93,4279.93 U1.A1@7015.93,4280.48 ; U1.A14@7015.93,3768.67 v1(7040,3768.67) ; U1.A9@7015.93,3965.52 7020.52,3965.52 v1(7040,3985) ; U1.A2@7015.93,4241.11 7017.11,4241.11 v1(7036,4260) ; U1.A24@7016.97,3374.97 v1(7036,3394) ; C13.1@7111.59,4123 C13.1@7118,4116.59 ; C51.1@7261,5317.41 7261.59,5318 v1(7336,5318) U5.A5@7363,5318 ; v1(7336,5268) U5.A4@7363,5268 ; v1(7388,5193) U5.B2@7413,5168 ; v1(7413,5091) U5.B1@7413,5118 ; U5.C5@7463,5318 v1(7488,5293) ; v1(7488,5193) U5.D3@7513,5218 ; v1(7488,5243) U5.D4@7513,5268 ; U5.D5@7513,5318 v1(7538,5343) ; v1(7538,5143) U5.E2@7563,5168 ; v1(7563,5091) U5.E1@7563,5118 ; U5.F5@7613,5318 v1(7638,5343) ; U5.F7@7613,5418 v1(7613,5445) ; v1(7638,5193) U5.G3@7663,5218 ; v1(7638,5243) U5.G4@7663,5268 ; v1(7638,5293) U5.G5@7663,5318 ; v1(7688,5143) U5.H2@7713,5168 ; v1(7713,5091) U5.H1@7713,5118 ; U5.J5@7763,5318 v1(7788,5343) ; v1(7788,5243) U5.K3@7813,5218 ; v1(7788,5293) U5.K4@7813,5268 ; U5.L1@7863,5118 v1(7890,5118) ; U5.L2@7863,5168 v1(7890,5168) ; U9.0@8568,4196 8577.84,4205.84 U9.7@8614.26,4205.84 8660.18,4205.84 v1(8666,4211.67) 8705.92,4211.67 C70.2@8715,4202.59 ; U9.8@8614.26,4225.53 8634.73,4246 v1(8666,4246) ; C52.1@10025,3781.41 10025.59,3782 v1(10114,3782) U6.A5@10141,3782 ; v1(10114,3732) U6.A4@10141,3732 ; v1(10166,3657) U6.B2@10191,3632 ; v1(10191,3555) U6.B1@10191,3582 ; U6.C5@10241,3782 v1(10266,3757) ; v1(10266,3657) U6.D3@10291,3682 ; v1(10266,3707) U6.D4@10291,3732 ; U6.D5@10291,3782 v1(10316,3807) ; v1(10316,3607) U6.E2@10341,3632 ; v1(10341,3555) U6.E1@10341,3582 ; U6.F5@10391,3782 v1(10416,3807) ; U6.F7@10391,3882 v1(10391,3909) ; v1(10416,3657) U6.G3@10441,3682 ; v1(10416,3707) U6.G4@10441,3732 ; v1(10416,3757) U6.G5@10441,3782 ; v1(10466,3657) U6.H2@10491,3632 ; v1(10491,3555) U6.H1@10491,3582 ; U6.J5@10541,3782 v1(10566,3807) ; v1(10566,3707) U6.K3@10591,3682 ; v1(10566,3757) U6.K4@10591,3732 ; U6.L1@10641,3582 10667.84,3582 v1(10668,3582.16) ; U6.L2@10641,3632 v1(10668,3632)
  Top Layer w10: J5.11@5551.65,5525.05 v1(5551.65,5579) ; v1(5646,5579) 5646,5525.19 J5.14@5646.14,5525.05 ; J5.17@5740.63,5525.05 v1(5740.63,5579) ; v1(5835,5579) 5835,5525.17 J5.20@5835.12,5525.05 ; U1.AK27@5874.2,3256.86 U1.AK27@5874.94,3256.86 ; v1(5933,3434) v1@5933.28,3434 ; v1@6011.69,3315.61 v1(6012.19,3315.61) ; U1.AF29@6031.68,3177.68 U1.AF29@6031.68,3178.12 ; v1@6090.76,3434 v1(6091,3434) ; U1.AD25@6110.42,3335.35 U1.AD25@6110.42,3335.6 ; v1(6130,3197.93) v1@6130.23,3197.93 ; v1(6248,3354.61) v1@6248,3355.5 ; v1(6287,3120) v1@6288.52,3120 ; v1@6367,3315.24 v1(6367,3316) ; v1@6406,3197.5 v1(6406,3198) ; v1(6485,3354.61) v1@6485.11,3354.61 ; J4.10@6489.88,5848.58 6489.88,5795.12 v1(6490,5795) ; J4.11@6505.63,5525.75 6505.63,5579.63 v1(6506,5580) ; v1(6521,5795) 6521.38,5795.38 J4.9@6521.38,5848.58 ; v1(6600,5580) 6600.12,5579.88 J4.14@6600.12,5525.75 ; U1.L24@6621.03,3374.97 U1.L24@6622.23,3374.97 ; v1(6642,3276) v1@6642.46,3276 ; J4.17@6694.61,5525.75 6694.61,5579.61 v1(6695,5580) ; U1.J30@6700.97,3138.75 6701.75,3138.75 v1(6721,3158) ; v1(6710,5795) 6710.35,5795.35 J4.3@6710.35,5848.58 ; v1@6759.94,3433.94 v1(6759.94,3434) ; v1(6773,5795) 6773.35,5795.35 J4.1@6773.35,5848.58 ; v1(6789,5580) 6789.09,5579.91 J4.20@6789.09,5525.75 ; v1(6799,3275.87) v1@6799,3276.94 ; U1.F29@6819.08,3177.68 U1.F29@6819.08,3178.12 ; U1.E22@6858.45,3453.71 U1.E22@6858.71,3453.71 ; v1@6917,3354.78 v1(6917,3355) ; U1.C28@6937.19,3217.49 U1.C28@6937.49,3217.49 ; U1.A24@7015.93,3374.97 U1.A24@7016.97,3374.97
  Top Layer w16: v1(5535.91,5794) J5.10@5535.91,5847.88 ; v1(5567,5794) 5567,5847.48 J5.9@5567.4,5847.88 ; v1(5756.38,5794) J5.3@5756.38,5847.88 ; v1(5819,5794) 5819.37,5794.37 J5.1@5819.37,5847.88 ; v1(6847,5262) U3.3@6847,5309.54
  Top Layer w20: U4.2@6215,5221 v3(6260,5221) ; C6.1@6498,4495.59 v1(6498,4528) ; U1.A5@7015.93,4123 C13.1@7111.59,4123 ; v1(7036,4260) 7111.3,4260 C17.1@7118,4266.7 ; R44.1@7364,5628 v2(7422,5628) ; pad.5@7403,4923 7463,4923 C49.1@7464,4924 ; C57.1@7639,5536.59 v2(7639,5603) R47.1@7706,5603 ; R49.1@7800,5603 v2(7858,5603) ; C61.1@8018,5392 v2(8068.41,5392) ; v1(8937,4803) U7.D12@9080.29,4803 ; v1(9043,4253) U7.D1@9080.29,4253 ; v1(9043,4303) U7.D2@9080.29,4303 ; v1(9043,4353) U7.D3@9080.29,4353 ; v1(9043,5103) U7.D18@9080.29,5103 ; v1(9043,5653) U7.D29@9080.29,5653 ; v1(9043,5703) U7.D30@9080.29,5703 ; v1(9043,5753) U7.D31@9080.29,5753 ; v1(9136,4154) U7.A2@9136,4193.35 ; U7.C13@9136,5812.65 v1(9136,5848) ; v1(9236,4154) U7.A4@9236,4193.35 ; U7.C11@9236,5812.65 v1(9236,5848) ; v1(9386,4154) U7.A7@9386,4193.35 ; v1(9786,4154) U7.A10@9786,4193.35 ; U7.C5@9786,5812.65 v1(9786,5848) ; v1(9936,4154) U7.A13@9936,4193.35 ; U7.C2@9936,5812.65 v1(9936,5848) ; U7.B1@9991.71,4253 v1(10029,4253) ; U7.B2@9991.71,4303 v1(10029,4303) ; U7.B3@9991.71,4353 v1(10029,4353) ; U7.B16@9991.71,5003 v1(10029,5003) ; U7.B19@9991.71,5153 v1(10029,5153) ; U7.B22@9991.71,5303 v1(10029,5303) ; U7.B27@9991.71,5553 v1(10029,5553) ; U7.B28@9991.71,5603 v1(10029,5603) ; U7.B29@9991.71,5653 v1(10029,5653) ; R45.1@10141,4102 v2(10198,4102) ; pad.11@10228,3367 C50.1@10291,3367 ; pad.13@10378,3366 10379,3367 C56.1@10441,3367 ; C58.1@10409,4026.59 v2(10409,4078) R48.1@10475,4078 ; pad.15@10528,3367 C60.1@10591,3367 ; R50.1@10572,4078 v2(10629,4078) ; v2(10708,6002) C48.1@10777.59,6002 ; v2(10710,6228) C47.1@10778.59,6228 ; C62.1@10815.59,3860 v2(10866,3860) ; C45.1@11588.41,6234 v2(11658,6234) ; C44.1@11588.41,6459 v2(11658,6459) ; C46.1@11589.41,6006 11590.05,6005.36 v2(11659,6005.36)
  Top Layer w30: C16.1@5176,5888 5374.25,5888 J5.S19@5405,5918.75 ; C19.1@5176,5984 5197.36,6005.36 J5.S10@5405,6005.36 ; J4.S3@6920,5821.02 7009.98,5911 C11.1@7162,5911 ; J4.S4@6920,6006.06 7161.06,6006.06 C9.1@7162,6007 ; C55.1@7663,4924 pad.7@7724,4924 ; C59.1@7813,4924 7859,4924 pad.9@7892,4957
  Top Layer w50: v2(6790,4668) 6790,4610.41 C21.1@6794,4606.41 ; C22.1@7027,4605.41 7051,4629.41 v2(7051,4667) ; C23.1@7260,4605.41 v2(7395,4605.41)
  Bottom Layer w16: v1(5567,5794) 5567,5754 C15.1@5587,5734 C20.1@5673,5734 ; v1(5756.38,5794) 5756.38,5738.62 C18.1@5761,5734 ; v1(6847,5262) 6995.59,5262 C4.1@6996,5261.59
  Bottom Layer w20: C38.1@5826,3649 5847,3670 v1(5894.08,3670) ; C31.1@5826,4003 5836.57,4003 v1(5893.6,3945.97) ; C28.1@5826,4084 5846,4064 v1(5893.6,4064) ; C27.1@5992,4494 5992.31,4494.31 v1(5992.31,4539) ; C30.1@6073,3799 6079.39,3799 v1(6130.39,3748) ; C32.1@6087.46,4091.54 6087.46,4099.07 v1(6130.39,4142) ; FB1.1@6219.54,3748 6219.54,3759.15 v1(6248.39,3788) ; C37.1@6234,3049 6234,3067 v1(6287,3120) C36.1@6340,3120 ; v3(6260,5221) 6314,5167 C41.1@6314,5163.46 ; C14.1@6445,4148.59 v1(6445,4182) ; v1(6521,5795) 6521,5751 C8.1@6538,5734 C12.1@6627,5734 ; C34.1@6669,3078 6669,3106 v1(6721,3158) ; v1(6710,5795) 6710,5746 C10.1@6722,5734 ; v1(7036,3394) 7068,3394 7068,3379 C40.1@7101,3346 ; v1(7040,3768.67) 7075.67,3768.67 7105,3798 C35.1@7105,3832 ; v1(7269,3773) C33.1@7269,3810
  Bottom Layer w50: v2(6790,4668) 6790,4610.41 C26.1@6794,4606.41 ; C25.1@7027,4605.41 7051,4629.41 v2(7051,4667) ; C24.1@7260,4605.41 v2(7395,4605.41)
  other v1: 6209,4142
GTP_REFCLK_CML_N: C64.2 U1.U7 | length 2413.4
  Top Layer w8: U1.U7@6386.01,4044.26 6386.01,4043.99 v1(6406,4024)
  Top Layer w10: v1(8746,4027) C64.2@8778.41,4027
  Signal Layer 4 w4: v1(6406,4024) 6419.5,4010.5 8729.5,4010.5 v1(8746,4027)
GTP_REFCLK_CML_P: C63.2 U1.U8 | length 2411.4
  Top Layer w8: U1.U8@6386.01,4004.89 6386.11,4004.89 v1(6406,3985)
  Top Layer w10: v1(8746,3986) C63.2@8778.41,3986
  Signal Layer 4 w4: v1(6406,3985) 6419.5,3998.5 8733.5,3998.5 v1(8746,3986)
GTP_REFCLK_LVDS33_N: C64.1 U7.A5 | length 631.5
  Top Layer w10: C64.1@8829.59,4027 8835.59,4021 v1(8870,4021) ; v1(9286,4154) U7.A5@9286,4193.35
  Signal Layer 4 w4: v1(8870,4021) 8903,4021 8911.5,4012.5 9240.5,4012.5 9304,4076 9304,4136 v1(9286,4154)
GTP_REFCLK_LVDS33_P: C63.1 U7.A6 | length 652.2
  Top Layer w10: C63.1@8829.59,3986 8835.59,3992 v1(8870,3992) ; v1(9336,4154) U7.A6@9336,4193.35
  Signal Layer 4 w4: v1(8870,3992) 8901,3992 8909.5,4000.5 9245.47,4000.5 9316,4071.03 9316,4134 v1(9336,4154)
HW_ver0_LVCMOS33: U1.A15 U7.D4 | length 2342.3
  Top Layer w4: U1.A15@7015.93,3729.3 7628.3,3729.3 8300,4401 U7.D4@9080,4401
HW_ver1_LVCMOS33: U1.B15 U7.D5 | length 2402.4
  Top Layer w4: U1.B15@6976.56,3729.3 6996.26,3749 7590,3749 8292,4451 U7.D5@9080,4451
HW_ver2_LVCMOS33: U1.B14 U7.D6 | length 2406.8
  Top Layer w4: U1.B14@6976.56,3768.67 6995.89,3788 7568,3788 8281,4501 U7.D6@9080,4501
JTAG_TCK: P1.3 U1.E10 | length 4370.2
  Top Layer w8: v1(6839,3946) 6858.45,3926.55 U1.E10@6858.45,3926.15
  Signal Layer 3 w4: v1(6839,3946) 6859,3926 7102.97,3926 9457,6280.03 P1.3@9457,7021
JTAG_TDI: P1.5 U1.H10 | length 4666
  Top Layer w8: v1(6721,3946) 6740.34,3926.66 U1.H10@6740.34,3926.15
  Signal Layer 2 w4: v1(6721,3946) 6701,3966 6701,4372 6771,4442 7618,4442 9257,6081 P1.5@9257,7021
JTAG_TDO: P1.4 U1.G10 | length 4689.7
  Top Layer w8: v1(6760,3946) 6779.71,3926.29 U1.G10@6779.71,3926.15
  Signal Layer 2 w4: v1(6760,3946) 6740,3966 6740,4360 6793,4413 7637,4413 9357,6133 P1.4@9357,7021
JTAG_TMS: P1.6 U1.F10 | length 4238.2
  Top Layer w8: v1(6799,3946) 6818.85,3926.15 U1.F10@6819.08,3926.15
  Signal Layer 3 w4: v1(6799,3946) 6819,3966 7089,3966 9157,6034 P1.6@9157,7021
Led1_LVCMOS18: R36.2 U1.AH2 | length 5538.2
  Top Layer w8: v1(5933,4261) U1.AH2@5952.94,4241.11
  Top Layer w10: v3(10050,6654) R36.2@10098,6654
  Signal Layer 4 w4: v1(5933,4261) 5933,4367 6370,4804 8698,4804 10050,6156 v3(10050,6654)
Led2_LVCMOS18: R37.2 U1.AJ2 | length 5578.5
  Top Layer w8: v1(5894,4261) 5913.57,4241.43 U1.AJ2@5913.57,4241.11
  Top Layer w10: v3(9959,6750) R37.2@10007,6750
  Signal Layer 4 w4: v1(5894,4261) 5894,4402 6320,4828 8394,4828 9171,5605 9367,5605 9959,6197 v3(9959,6750)
Led3_LVCMOS18: R38.2 U1.AF2 | length 5702.1
  Top Layer w8: v1(6012,4261) 6031.68,4241.32 U1.AF2@6031.68,4241.11
  Top Layer w10: v3(10334,6654) R38.2@10382,6654
  Signal Layer 4 w4: v1(6012,4261) 6012,4294 6474,4756 8937,4756 10334,6153 v3(10334,6654)
Led4_LVCMOS18: R39.2 U1.AG2 | length 5731.2
  Top Layer w8: v1(5972,4261) 5972.42,4261 U1.AG2@5992.31,4241.11
  Top Layer w10: v3(10242,6751) R39.2@10290,6751
  Signal Layer 4 w4: v1(5972,4261) 5972,4332 6420,4780 8803,4780 10242,6219 v3(10242,6751)
Led5_LVCMOS18: R40.2 U1.AC2 | length 5768.5
  Top Layer w8: v1(6130,4261) 6130,4260.9 U1.AC2@6149.79,4241.11
  Top Layer w10: v3(10618,6654) R40.2@10666,6654
  Signal Layer 4 w4: v1(6130,4261) 6130,4298 6540,4708 8999,4708 10618,6327 v3(10618,6654)
Led6_LVCMOS18: R41.2 U1.AD2 | length 5835.6
  Top Layer w8: v1(6091,4261) 6110.42,4241.58 U1.AD2@6110.42,4241.11
  Top Layer w10: v3(10528,6750) R41.2@10576,6750
  Signal Layer 4 w4: v1(6091,4261) 6091,4303 6520,4732 8966,4732 10528,6294 v3(10528,6750)
Localclock_LVCMOS33: U1.G13 U4.3 | length 1543.6
  Top Layer w8: v1(6760,3827.66) 6760.09,3827.66 U1.G13@6779.71,3808.04 U1.G13@6779.71,3808.29
  Top Layer w10: v3(6215,4981) U4.3@6215,5047.77
  Signal Layer 2 w4: v1(6602.16,3866.6) 6621.76,3847 6740.66,3847 v1(6760,3827.66)
  Signal Layer 3 w4: v3(6215,4981) 6215,4884 6583,4516 6583,3885.76 v1(6602.16,3866.6)
MGTrefclk_CML_N: C5.2 U1.R7 | length 1220.8
  Top Layer w10: U1.R7@6464.75,4044.26 v1(6485,4024) ; v1(6910.41,4993) 6910.41,5018.41 C5.2@6917.41,5025.41
  Signal Layer 2 w4: v1(6485,4024) 6471,4038 6471,4428 6901.41,4858.41 6904.41,4861.41 6904.41,4987 v1(6910.41,4993)
MGTrefclk_CML_P: C7.2 U1.R8 | length 1220.2
  Top Layer w10: v1(6445,4024) 6464.11,4004.89 U1.R8@6464.75,4004.89 ; C7.2@6878.41,5025.41 6885.41,5018.41 v1(6885.41,4993)
  Signal Layer 2 w4: v1(6445,4024) 6459,4038 6459,4432.97 6892.41,4866.38 6892.41,4986 v1(6885.41,4993)
MGTrefclk_LVDS25_N: C5.1 U3.5 | length 111.3
  Top Layer w10: C5.1@6924,5083.18 C5.1@6917.41,5076.59 6905,5089 6905,5114 U3.5@6947,5156
MGTrefclk_LVDS25_P: C7.1 U3.4 | length 109.1
  Top Layer w10: U3.4@6847,5156 6889,5114 6889,5087.18 C7.1@6878.41,5076.59 C7.1@6872.82,5082.18
NetC6_2: C6.2 L1.1 R17.1 U1.W7 | length 542.4
  Top Layer w8: U1.W7@6307.27,4044.26 6308.26,4044.26 v1(6327,4063)
  Top Layer w20: L1.1@6447,4446.54 6495.87,4446.54 C6.2@6498,4444.41 6498,4400 R17.1@6501,4397 6511,4387 v1(6511,4369)
  Signal Layer 1 w8: v1(6327,4063) 6386,4122 6386,4244 v1(6511,4369)
NetC8_2: C8.2 C12.2 J4.15 L2.1 | length 742.3
  Top Layer w20: J4.15@6631.61,5525.75 6631.61,5635.61 v1(6632,5636)
  Top Layer w30: v2(7051,5625) L2.1@7114,5625
  Signal Layer 1 w20: v1(6632,5636) 6655,5613 6816,5613 6872,5557 6983,5557 v2(7051,5625)
  Bottom Layer w20: C8.2@6538,5644 C12.2@6627,5644
NetC10_2: C10.2 J4.16 L3.2 | length 614.1
  Top Layer w20: J4.16@6663.11,5525.75 6663.11,5585.11 v1(6722,5644)
  Top Layer w30: v2(7052,5782) L3.2@7114,5782
  Signal Layer 1 w20: v1(6722,5644) 6722,5682 6810,5770 7040,5770 v2(7052,5782)
NetC13_2: C13.2 L4.2 U1.B7 U1.D7 U1.F7 U1.H7 U1.K7 U1.M7 U1.P7 | length 858.6
  Top Layer w8: U1.P7@6504.12,4044.26 6506.26,4044.26 v1(6525,4063) ; U1.M7@6582.86,4044.26 6583.26,4044.26 v1(6602,4063) ; U1.K7@6661.6,4044.26 6681.2,4063.86 v1(6681.2,4064) ; U1.H7@6740.34,4044.26 6740.48,4044.26 v1(6760.22,4064) ; U1.F7@6819.08,4044.26 v1(6838.79,4064) ; U1.D7@6897.82,4044.26 6917.56,4064 v1(6918,4064) ; U1.B7@6976.56,4044.26 6996.15,4063.85 v1(6996.15,4064) ; C13.2@7116.59,4064 C13.2@7118,4065.41
  Top Layer w30: v1(7090,4063.97) C13.2@7116.56,4063.97 ; C13.2@7118,4065.41 L4.2@7187,4065.41
  Signal Layer 4 w50: v1(6525,4063) 6525.97,4063.97 v1(7090,4063.97)
NetC14_2: C14.2 L5.2 U1.T7 U1.V7 | length 514.5
  Top Layer w8: U1.V7@6346.64,4044.26 6347.26,4044.26 v1(6366,4063) ; U1.T7@6425.38,4044.26 6426.67,4044.26 v1(6445.41,4063)
  Signal Layer 3 w16: v1(6338,4339) 6346,4331 6346,4083 v1(6366,4063) v1(6445.41,4063)
  Bottom Layer w20: L5.2@6280,4339 v1(6338,4339) ; C14.2@6445,4097.41 6445.41,4097 v1(6445.41,4063)
NetC15_2: C15.2 C20.2 J5.15 L6.1 | length 727.8
  Top Layer w16: J5.15@5677.64,5525.05 5677.64,5643.64 v1(5678,5644)
  Top Layer w30: L6.1@5222,5609 v2(5277,5609)
  Signal Layer 1 w20: v2(5277,5609) 5350,5682 5416,5682 5473,5625 5659,5625 v1(5678,5644)
  Bottom Layer w16: C15.2@5587,5644 C20.2@5673,5644 v1(5678,5644)
NetC17_2: C17.2 L7.2 U1.B3 U1.C5 U1.D3 U1.E5 U1.F3 U1.G5 U1.H3 U1.J5 U1.K3 U1.L5 U1.M3 U1.N5 U1.P3 U1.R5 U1.T3 U1.U5 U1.V3 U1.W5 | length 605.5
  Top Layer w8: U1.W5@6307.27,4123 6327,4142.73 v1(6327,4143) ; U1.V3@6346.64,4201.74 6346.74,4201.74 v1(6366,4221) ; U1.U5@6386.01,4123 v1(6406,4143) ; U1.T3@6425.38,4201.74 6425.74,4201.74 v1(6445,4221) ; U1.R5@6464.75,4123 6484.57,4142.82 v1(6484.57,4143) ; U1.P3@6504.12,4201.74 6504.61,4201.74 v1(6523.87,4221) ; U1.N5@6543.49,4123 6543.49,4123.49 v1(6563,4143) ; U1.M3@6582.86,4201.74 6583.2,4201.74 v1(6602.46,4221) ; v1(6602.46,4143) 6602.46,4142.77 U1.L5@6622.23,4123 ; U1.K3@6661.6,4201.74 6661.94,4201.74 v1(6681.2,4221) ; U1.J5@6700.97,4123 6702,4123 v1(6721,4142) ; U1.H3@6740.37,4201.74 v1(6759.63,4221) ; U1.G5@6779.71,4123 6780,4123 v1(6799,4142) ; U1.F3@6819.08,4201.74 6819.53,4201.74 v1(6838.79,4221) ; U1.E5@6858.45,4123 6859,4123 v1(6878,4142) ; U1.D3@6897.82,4201.74 6917,4220.92 v1(6917,4221) ; U1.C5@6937.19,4123 6937.74,4123 v1(6956.74,4142) ; U1.B3@6976.56,4201.74 U1.B3@6976.56,4201.74 v1(6995.89,4221)
  Top Layer w20: v2(7075,4214.67) 7117.15,4214.67 C17.2@7118,4215.52 L7.2@7182,4215.52